# Altium PCB MY_PCB.PcbDoc
Units mil, origin at the board's own origin, x right, y up, seen from the top; angles counter-clockwise.
Board outline 4240.46 x 3860.94 mil, 2 copper layers (Top Layer, Bottom Layer); 241 components, 149 nets, 701 pads, 2 vias.
Unrouted connection lines stored in the file: 369.
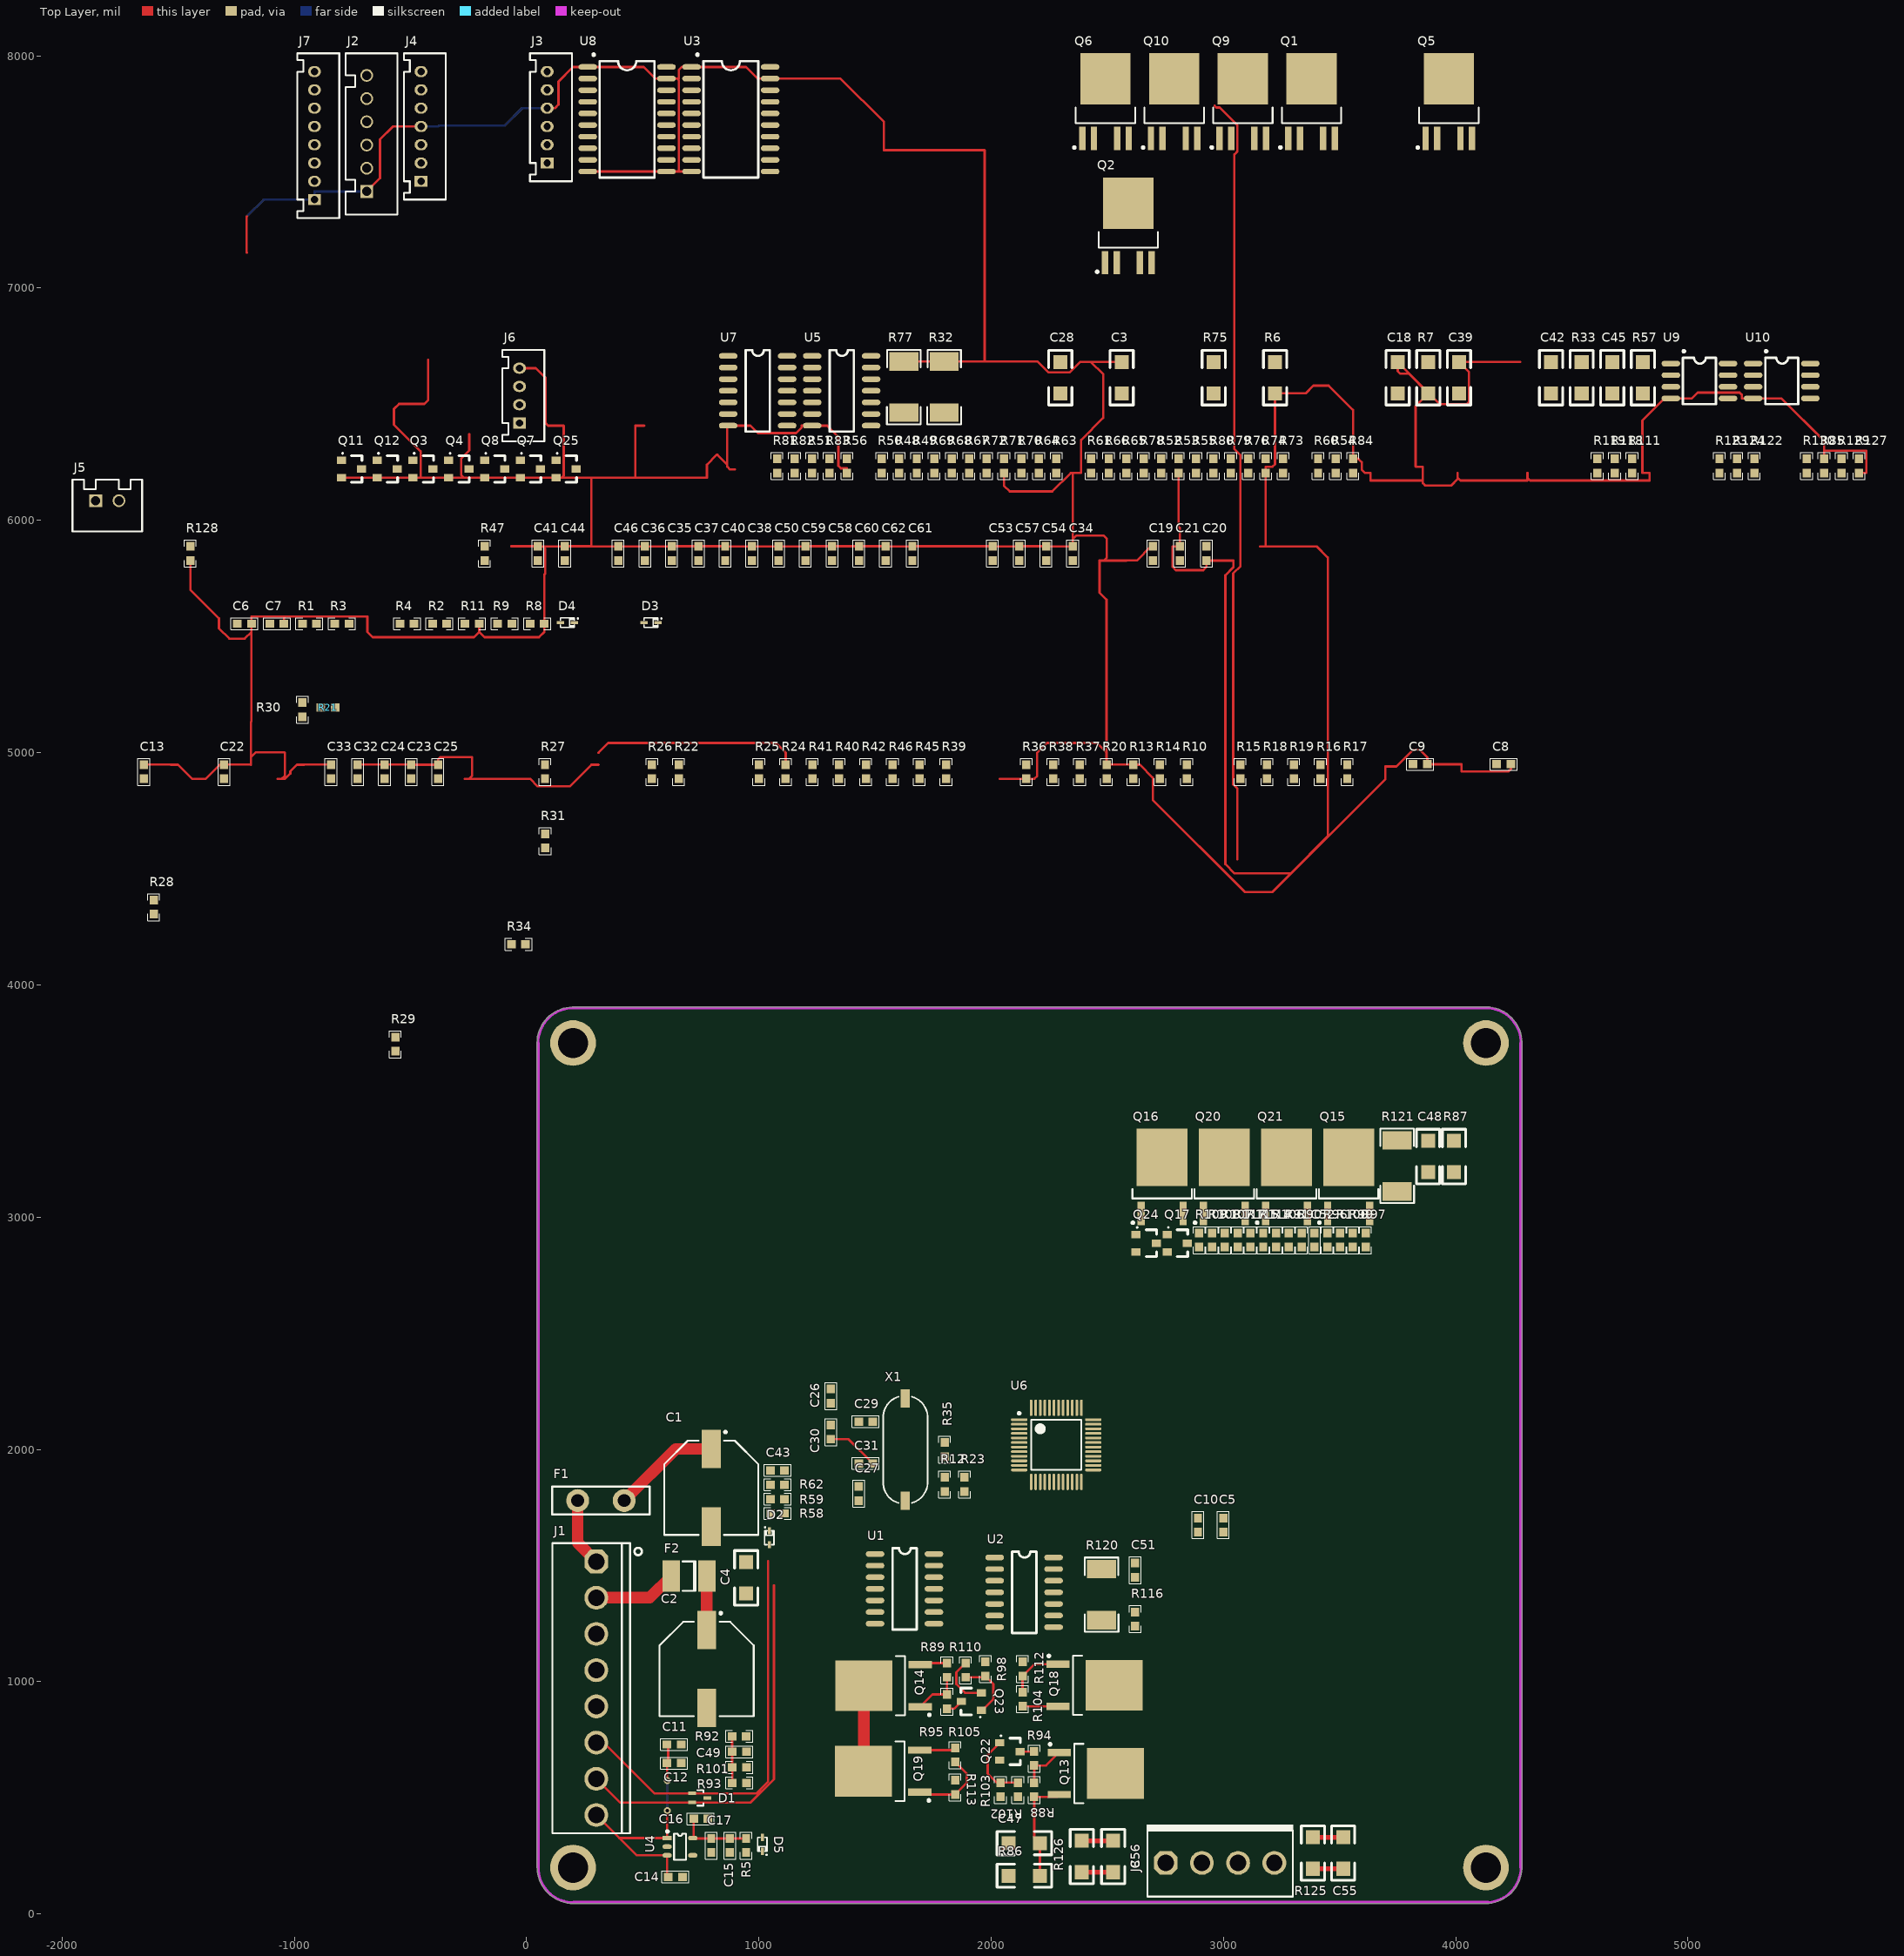
[diagram p0: Top Layer view]
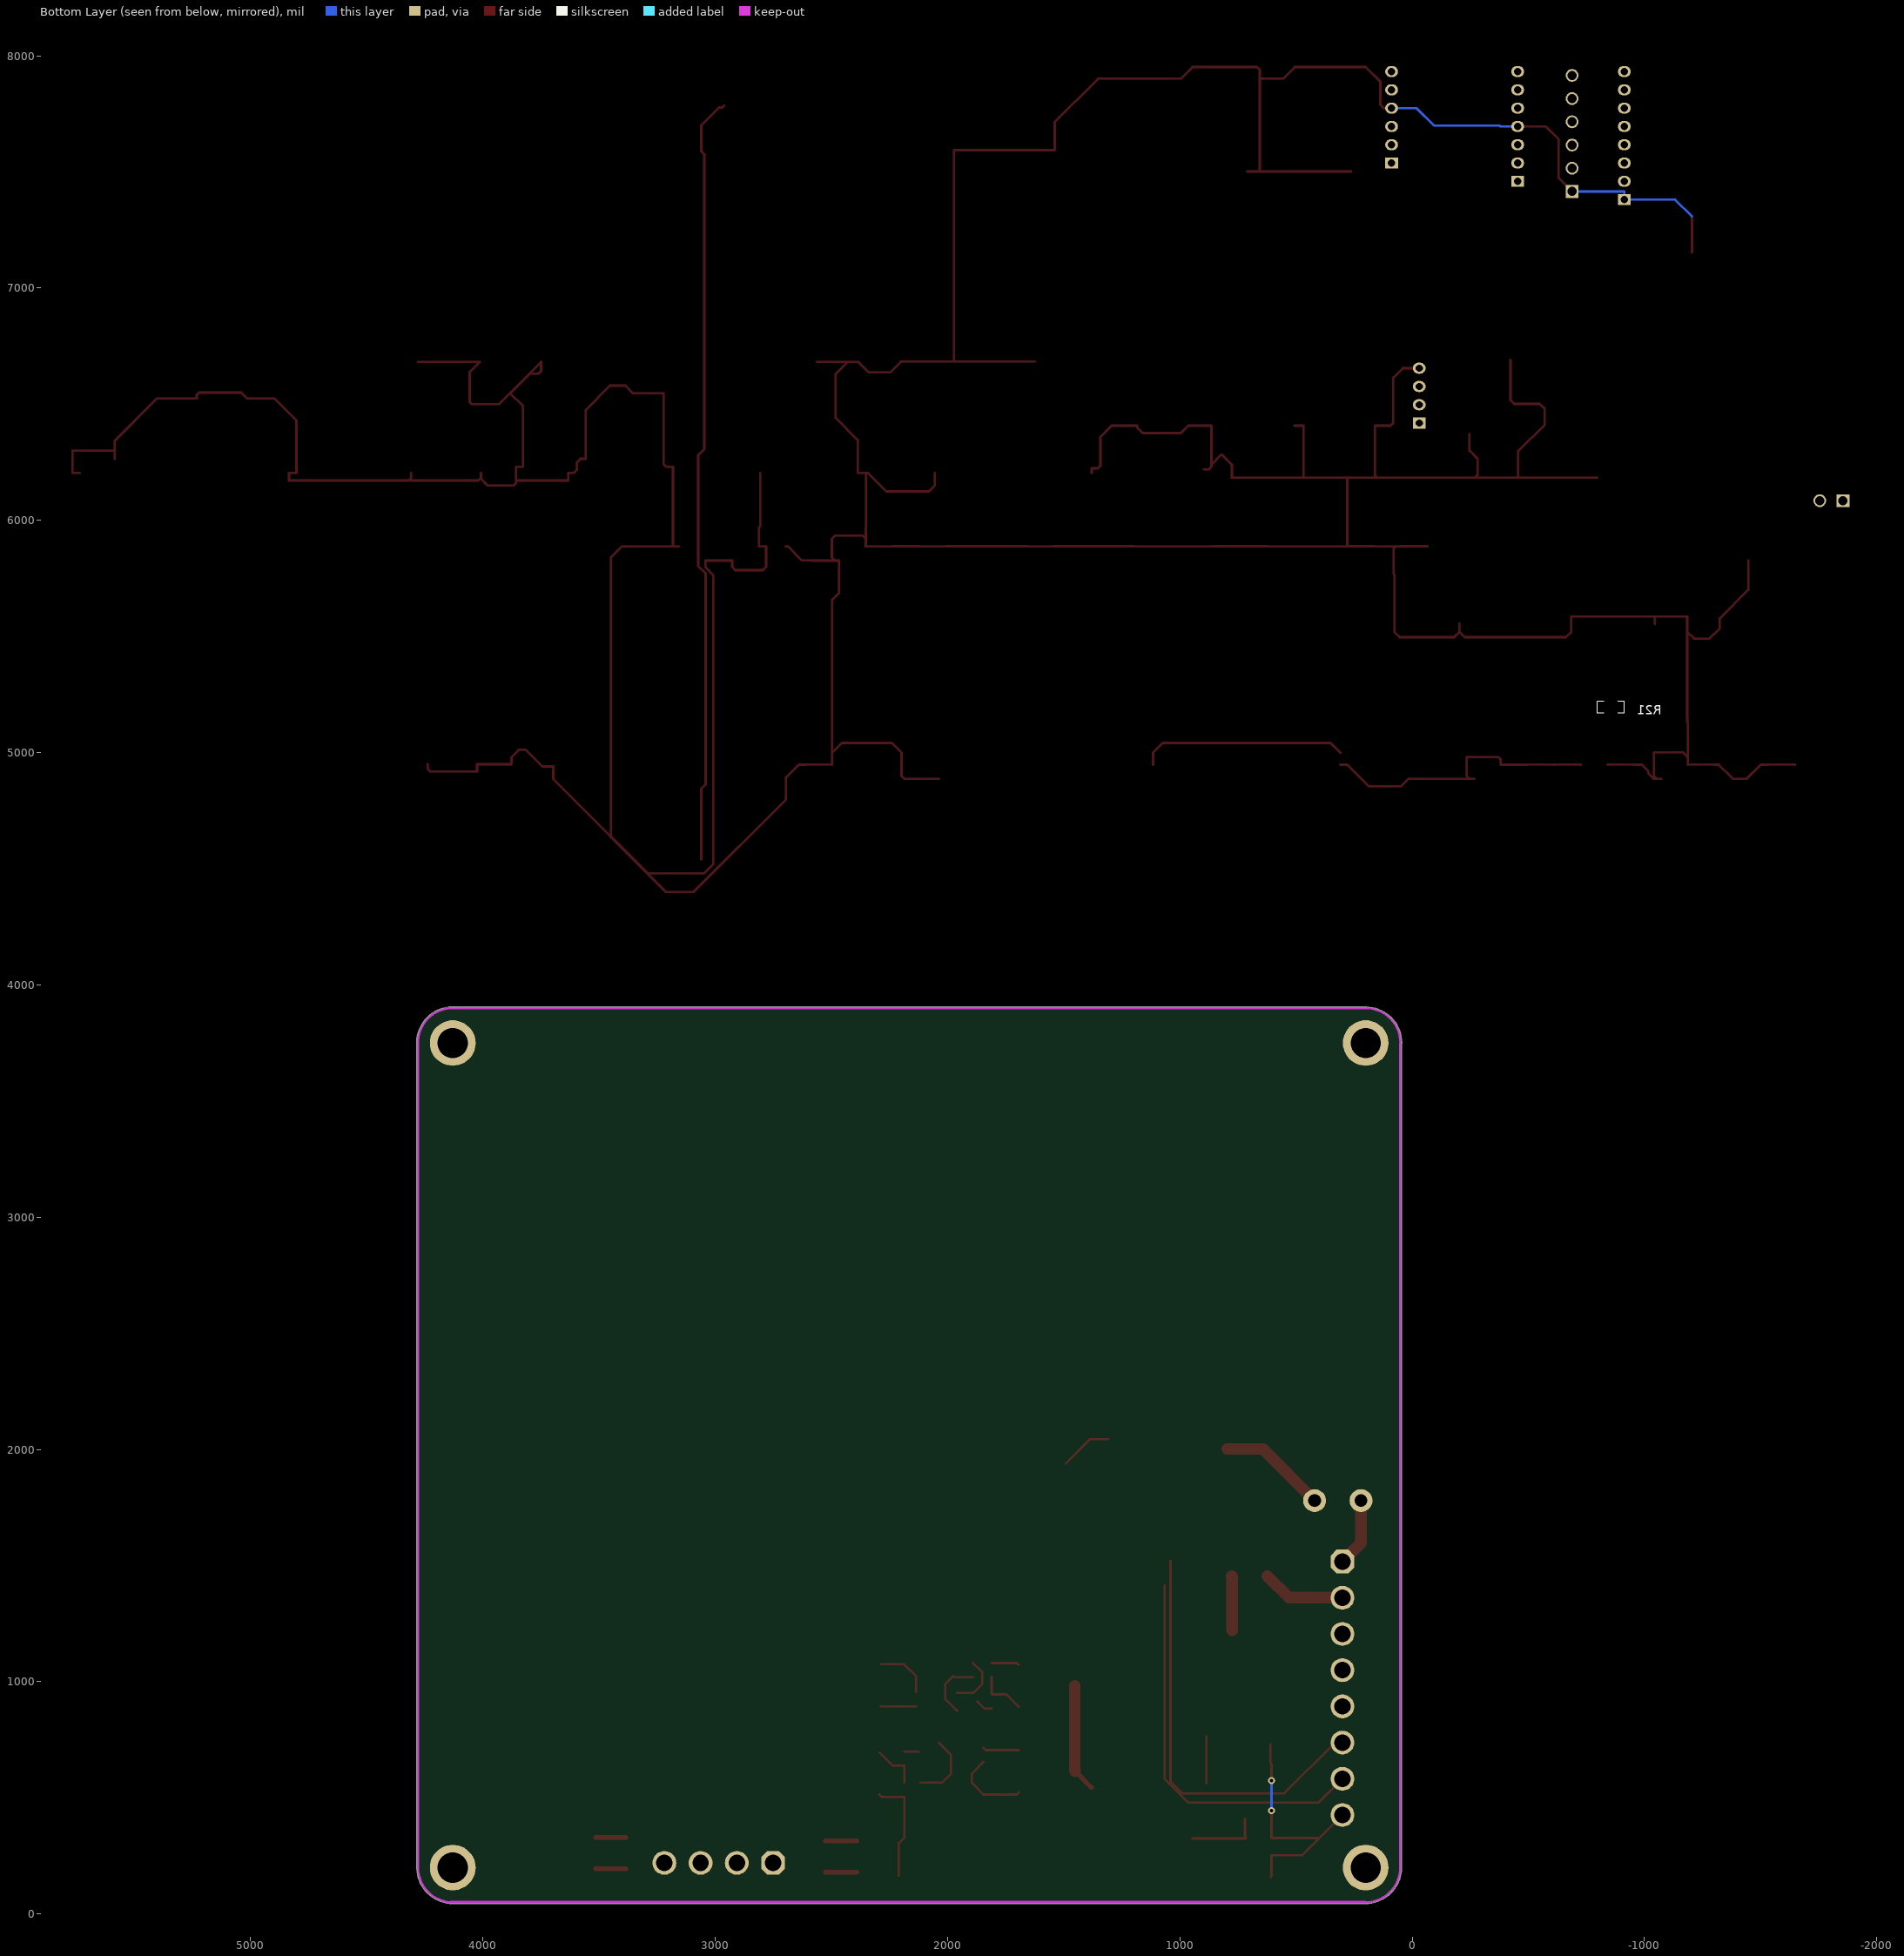
[diagram p1: Bottom Layer view, seen from below]

## Layer stack, top to bottom
Top Layer: signal copper 1.4
Dielectric: dielectric 12.6, FR-4, Dk 4.8
Bottom Layer: signal copper 1.4

## Board outline
46.01,197.12 cw(c51.18,200) 45.26,200 45.26,3748.36 cw(c50,3750) 44.98,3750 cw(c200,3750) 196.8,3904.98 cw(c200,3900) 200,3905.92 4130,3905.92 cw(c4130,3900) 4132.87,3905.18 cw(c4130.37,3750.65) 4284.9,3752.49 cw(c4279.53,3750) 4285.45,3750 4285.45,200 cw(c4279.53,200) 4284.51,196.8 cw(c4130,200) 4142.85,45.99 cw(c4140,51.18) 4140,45.26 202.64,45.26 cw(c201,50) 201,44.99 cw(c201,200)

## Design rules (kind name [scope] priority, off if disabled: settings)
Clearance [All] p1: gap=0.12
ComponentClearance [All] p1: gap=0 collisioncheckmode=3 verticalgap=0 showdistances=TRUE
PolygonConnect [All] p1: connectstyle=Relief reliefconductorwidth=10 reliefentries=4 polygonreliefangle="90 Angle"
RoutingVias [All] p1: holewidth=15 width=30 viastyle="Through Hole" minholewidth=10 minwidth=20 maxholewidth=28 maxwidth=50
SilkscreenOverComponentPads [All] p1: minsilkscreentomaskgap=10
SolderMaskExpansion [All] p1: expansion=4
Width [All] p1: maxlimit=128.11 minlimit=10 preferedwidth=10
26 further rules are at their usual default settings.

## Components (designator, comment, footprint, x,y, rotation, side; value= is the part's Value field where it differs from the comment)
C1 "470uF/35V" CAP_SO_10*10 800,1990 r0 top
C2 "470uF/35V" CAP_SO_10*10 780,1210 r0 top
C3 "C1206" 1206 2561.83,6547.05 r90 top
C4 "C1206" 1206 945,1380 r90 top
C5 "C0603" C0603_M1608 2999.12,1674.53 r90 top
C6 "C0603" C0603_M1608 -1214.88,5555.2 r0 top
C7 "C0603" C0603_M1608 -1074.8,5555.2 r0 top
C8 "C0603" C0603_M1608 4206.91,4950.28 r0 top
C9 "C0603" C0603_M1608 3846.75,4950.28 r0 top
C10 "C0603" C0603_M1608 2890,1674.49 r90 top
C11 "C0603" C0603_M1608 635,730 r180 top
C12 "C0603" C0603_M1608 635,650 r180 top
C13 "C0603" C0603_M1608 -1647.59,4917.8 r90 top
C14 "C0603" C0603_M1608 640,160 r180 top
C15 "C0603" C0603_M1608 875,295 r270 top
C16 "C0603" C0603_M1608 750,410 r180 top
C17 "C0603" C0603_M1608 795,295 r90 top
C18 "C1206" 1206 3749.83,6547.05 r90 top
C19 "C0603" C0603_M1608 2696.81,5857.8 r90 top
C20 "C0603" C0603_M1608 2927.05,5857.8 r90 top
C21 "C0603" C0603_M1608 2811.93,5857.8 r90 top
C22 "C0603" C0603_M1608 -1302.24,4917.8 r90 top
C23 "C0603" C0603_M1608 -496.41,4917.8 r90 top
C24 "C0603" C0603_M1608 -611.53,4917.8 r90 top
C25 "C0603" C0603_M1608 -381.29,4917.8 r90 top
C26 "C0603" C0603_M1608 1310,2230 r270 top
C27 "C0603" C0603_M1608 1430,1810 r270 top
C28 "1206" 1206 2297.83,6547.05 r90 top
C29 "C0603" C0603_M1608 1460,2120 r0 top
C30 "C0603" C0603_M1608 1310,2075 r90 top
C31 "C0603" C0603_M1608 1460,1940 r180 top
C32 "C0603" C0603_M1608 -726.65,4917.8 r90 top
C33 "C0603" C0603_M1608 -841.77,4917.8 r90 top
C34 "C0603" C0603_M1608 2351.46,5857.8 r90 top
C35 "C0603" C0603_M1608 624.69,5857.8 r90 top
C36 "C0603" C0603_M1608 509.57,5857.8 r90 top
C37 "C0603" C0603_M1608 739.8,5857.8 r90 top
C38 "C0603" C0603_M1608 970.04,5857.8 r90 top
C39 "C1206" 1206 4013.83,6547.05 r90 top
C40 "C0603" C0603_M1608 854.92,5857.8 r90 top
C41 "C0603" C0603_M1608 49.1,5857.8 r90 top
C42 "1206" 1206 4409.83,6547.05 r90 top
C43 "C0603" C0603_M1608 1080,1910 r180 top
C44 "C0603" C0603_M1608 164.21,5857.8 r90 top
C45 "1206" 1206 4673.83,6547.05 r90 top
C46 "C0603" C0603_M1608 394.45,5857.8 r90 top
C47 "C1206" 1206 2210,305 r180 top
C48 "C1206" 1206 3880.54,3194 r90 top
C49 "C0603" C0603_M1608 915.51,698.33 r0 top
C50 "C0603" C0603_M1608 1085.16,5857.8 r90 top
C51 "C0603" C0603_M1608 2620,1480 r90 top
C52 "C0603" C0603_M1608 3391.59,2901.61 r90 top
C53 "C0603" C0603_M1608 2006.11,5857.8 r90 top
C54 "C0603" C0603_M1608 2236.34,5857.8 r90 top
C55 "1206" 1206 3515,330 r270 top
C56 "1206" 1206 2525,315 r270 top
C57 "C0603" C0603_M1608 2121.22,5857.8 r90 top
C58 "C0603" C0603_M1608 1315.4,5857.8 r90 top
C59 "C0603" C0603_M1608 1200.28,5857.8 r90 top
C60 "C0603" C0603_M1608 1430.51,5857.8 r90 top
C61 "C0603" C0603_M1608 1660.75,5857.8 r90 top
C62 "C0603" C0603_M1608 1545.63,5857.8 r90 top
D1 "RClamp0502B" SOT-523 745,500 r0 top
D2 "SOD-523" SOD-523 1045,1620 r90 top
D3 "SOD-523" SOD-523 534.86,5559.76 r0 top
D4 "SOD-523" SOD-523 175.61,5559.76 r0 top
D5 "SOD-523" SOD-523 1015,300 r270 top
F1 "BK30-400" FUSE-FRG-5MM 320,1780 r180 top
F2 "1812" 1812 700,1455 r180 top
J1 "VH3.96-8P" VH3.96-8P 300,1050 r270 top
J2 "XH2.54-6" XH2.54-6 -688.36,7666.06 r90 top
J3 "PH2.0-6P" PH2.0-6P 88.43,7735.47 r90 top
J4 "PH2.0-7P" PH2.0-7P -454.49,7696.1 r90 top
J5 "XH2.54-2" XH2.54-2 -1805,6085 r0 top
J6 "PH2.0-4P" PH2.0-4P -30.53,6537.26 r90 top
J7 "PH2.0-8P" PH2.0-8P -913.34,7656.73 r90 top
J8 "VH3.96-4P" VH3.96-4P 2985,220 r0 top
Q1 "TO-252-4" TO-252-4L 3278.93,7644.86 r90 top
Q2 "TO-252-4" TO-252-4L 2490,7110 r90 top
Q3 "SOT-23" SOT-23_L -445.82,6221.19 r0 top
Q4 "SOT-23" SOT-23_L -291.84,6221.19 r0 top
Q5 "TO-252-4" TO-252-4L 3870.11,7644.86 r90 top
Q6 "TO-252-4" TO-252-4L 2392.15,7644.86 r90 top
Q7 "SOT-23" SOT-23_L 16.13,6221.19 r0 top
Q8 "SOT-23" SOT-23_L -137.85,6221.19 r0 top
Q9 "TO-252-4" TO-252-4L 2983.33,7644.86 r90 top
Q10 "TO-252-4" TO-252-4L 2687.74,7644.86 r90 top
Q11 "SOT-23" SOT-23_L -753.79,6221.19 r0 top
Q12 "SOT-23" SOT-23_L -599.8,6221.19 r0 top
Q13 "D-PAK" TO-252-2L 2450.35,605 r0 top
Q14 "D-PAK" TO-252-2L 1536.68,983.11 r180 top
Q15 "D-PAK" TO-252-2L 3538.98,3173.32 r90 top
Q16 "D-PAK" TO-252-2L 2735.83,3173.32 r90 top
Q17 "SOT-23" SOT-23_L 2800.98,2888.14 r0 top
Q18 "D-PAK" TO-252-2L 2445,985 r0 top
Q19 "D-PAK" TO-252-2L 1535,615 r180 top
Q20 "D-PAK" TO-252-2L 3003.54,3173.32 r90 top
Q21 "D-PAK" TO-252-2L 3271.26,3173.32 r90 top
Q22 "SOT-23" SOT-23_L 2080.35,700 r0 top
Q23 "SOT-23" SOT-23_L 1915,915 r180 top
Q24 "SOT-23" SOT-23_L 2666.99,2888.14 r0 top
Q25 "SOT-23" SOT-23_L 170.12,6221.19 r0 top
R1 "R0603" 0603#1 -934.72,5555.2 r0 top
R2 "R0603" 0603#1 -374.41,5555.2 r0 top
R3 "R0603" 0603#1 -794.65,5555.2 r0 top
R4 "R0603" 0603#1 -514.49,5555.2 r0 top
R5 "R0603" 0603#1 945,295 r90 top
R6 "R1206" 1206 3221.83,6547.05 r90 top
R7 "R1206" 1206 3881.83,6547.05 r90 top
R8 "R0603" 0603#1 45.83,5555.2 r0 top
R9 "R0603" 0603#1 -94.25,5555.2 r0 top
R10 "R0603" 0603#1 2842.02,4917.8 r90 top
R11 "R0603" 0603#1 -234.33,5555.2 r0 top
R12 "R0603" 0603#1 1800,1850 r270 top
R13 "R0603" 0603#1 2611.78,4917.8 r90 top
R14 "R0603" 0603#1 2726.9,4917.8 r90 top
R15 "R0603" 0603#1 3072.25,4917.8 r90 top
R16 "R0603" 0603#1 3417.61,4917.8 r90 top
R17 "R0603" 0603#1 3532.72,4917.8 r90 top
R18 "R0603" 0603#1 3187.37,4917.8 r90 top
R19 "R0603" 0603#1 3302.49,4917.8 r90 top
R20 "R0603" 0603#1 2496.66,4917.8 r90 top
R21 "R0603" 0603#2 -855,5195 r180 bottom
R22 "R0603" 0603#1 654.77,4917.8 r90 top
R23 "R0603" 0603#1 1885,1850 r270 top
R24 "R0603" 0603#1 1115.24,4917.8 r90 top
R25 "R0603" 0603#1 1000.12,4917.8 r90 top
R26 "R0603" 0603#1 539.65,4917.8 r90 top
R27 "R0603" 0603#1 79.18,4917.8 r90 top
R28 "R0603" 0603#1 -1605,4335 r90 top
R29 "R0603" 0603#1 -565,3745 r90 top
R30 "R0603" 0603#1 -965,5185 r90 top
R31 "R0603" 0603#1 80,4620 r90 top
R32 "R2512" R2512 1797.66,6464.05 r90 top
R33 "R1206" 1206 4541.83,6547.05 r90 top
R34 "R0603" 0603#1 -35,4175 r0 top
R35 "R0603" 0603#1 1800,2000 r270 top
R36 "R0603" 0603#1 2151.31,4917.8 r90 top
R37 "R0603" 0603#1 2381.54,4917.8 r90 top
R38 "R0603" 0603#1 2266.42,4917.8 r90 top
R39 "R0603" 0603#1 1805.95,4917.8 r90 top
R40 "R0603" 0603#1 1345.48,4917.8 r90 top
R41 "R0603" 0603#1 1230.36,4917.8 r90 top
R42 "R0603" 0603#1 1460.6,4917.8 r90 top
R45 "R0603" 0603#1 1690.83,4917.8 r90 top
R46 "R0603" 0603#1 1575.71,4917.8 r90 top
R47 "R0603" 0603#1 -181.14,5857.8 r90 top
R48 "R0603" 0603#1 1604.43,6234.65 r90 top
R49 "R0603" 0603#1 1679.55,6234.65 r90 top
R50 "R0603" 0603#1 1529.31,6234.65 r90 top
R51 "R0603" 0603#1 1228.84,6234.65 r90 top
R52 "R0603" 0603#1 2731.21,6234.65 r90 top
R53 "R0603" 0603#1 2806.32,6234.65 r90 top
R54 "R0603" 0603#1 3482.39,6234.65 r90 top
R55 "R0603" 0603#1 2881.44,6234.65 r90 top
R56 "R0603" 0603#1 1379.08,6234.65 r90 top
R57 "R1206" 1206 4805.83,6547.05 r90 top
R58 "R0603" 0603#1 1080,1725 r180 top
R59 "R0603" 0603#1 1079.96,1786.67 r0 top
R60 "R0603" 0603#1 3407.27,6234.65 r90 top
R61 "R0603" 0603#1 2430.73,6234.65 r90 top
R62 "R0603" 0603#1 1080,1848.33 r0 top
R63 "R0603" 0603#1 2280.5,6234.65 r90 top
R64 "R0603" 0603#1 2205.38,6234.65 r90 top
R65 "R0603" 0603#1 2580.97,6234.65 r90 top
R66 "R0603" 0603#1 2505.85,6234.65 r90 top
R67 "R0603" 0603#1 1904.91,6234.65 r90 top
R68 "R0603" 0603#1 1829.79,6234.65 r90 top
R69 "R0603" 0603#1 1754.67,6234.65 r90 top
R70 "R0603" 0603#1 2130.26,6234.65 r90 top
R71 "R0603" 0603#1 2055.14,6234.65 r90 top
R72 "R0603" 0603#1 1980.02,6234.65 r90 top
R73 "R0603" 0603#1 3257.03,6234.65 r90 top
R74 "R0603" 0603#1 3181.92,6234.65 r90 top
R75 "R1206" 1206 2957.83,6547.05 r90 top
R76 "R0603" 0603#1 3106.8,6234.65 r90 top
R77 "R2512" R2512 1623.99,6464.05 r90 top
R78 "R0603" 0603#1 2656.09,6234.65 r90 top
R79 "R0603" 0603#1 3031.68,6234.65 r90 top
R80 "R0603" 0603#1 2956.56,6234.65 r90 top
R81 "R0603" 0603#1 1078.61,6234.65 r90 top
R82 "R0603" 0603#1 1153.72,6234.65 r90 top
R83 "R0603" 0603#1 1303.96,6234.65 r90 top
R84 "R0603" 0603#1 3557.51,6234.65 r90 top
R85 "R0603" 0603#1 5585.7,6234.65 r90 top
R86 "R1206" 1206 2075,165 r0 top
R87 "R1206" 1206 3992.54,3194 r90 top
R88 "R0603" 0603#1 2185.35,535 r270 top
R89 "R0603" 0603#1 1810,1050 r90 top
R90 "R0603" 0603#1 3336.48,2901.61 r90 top
R91 "R0603" 0603#1 3281.36,2901.61 r90 top
R92 "R0603" 0603#1 915,765 r0 top
R93 "R0603" 0603#1 916.02,565 r180 top
R94 "R0603" 0603#1 2185.35,670 r270 top
R95 "R0603" 0603#1 1810,915 r90 top
R96 "R0603" 0603#1 3446.71,2901.61 r90 top
R97 "R0603" 0603#1 3612.07,2901.61 r90 top
R98 "R0603" 0603#1 1975,1055 r270 top
R99 "R0603" 0603#1 3556.95,2901.61 r90 top
R100 "R0603" 0603#1 3501.83,2901.61 r90 top
R101 "R0603" 0603#1 915.51,631.67 r180 top
R102 "R0603" 0603#1 2115.35,535 r270 top
R103 "R0603" 0603#1 2040.35,535 r90 top
R104 "R0603" 0603#1 2135,925 r270 top
R105 "R0603" 0603#1 1845,685 r90 top
R106 "R0603" 0603#1 3226.24,2901.61 r90 top
R107 "R0603" 0603#1 3005.77,2901.61 r90 top
R108 "R0603" 0603#1 2950.65,2901.61 r90 top
R109 "R0603" 0603#1 2895.53,2901.61 r90 top
R110 "R0603" 0603#1 1890,1050 r270 top
R111 "R0603" 0603#1 4759.4,6234.65 r90 top
R112 "R0603" 0603#1 2135,1055 r270 top
R113 "R0603" 0603#1 1845,545 r270 top
R114 "R0603" 0603#1 3171.12,2901.61 r90 top
R115 "R0603" 0603#1 3116,2901.61 r90 top
R116 "R0603" 0603#1 2620,1270 r90 top
R117 "R0603" 0603#1 3060.88,2901.61 r90 top
R118 "R0603" 0603#1 4684.28,6234.65 r90 top
R119 "R0603" 0603#1 4609.16,6234.65 r90 top
R120 "R2512" R2512 2475,1265 r90 top
R121 "R2512" R2512 3747.7,3111 r90 top
R122 "R0603" 0603#1 5285.22,6234.65 r90 top
R123 "R0603" 0603#1 5134.99,6234.65 r90 top
R124 "R0603" 0603#1 5210.11,6234.65 r90 top
R125 "R1206" 1206 3385,330 r270 top
R126 "R1206" 1206 2390,315 r270 top
R127 "R0603" 0603#1 5735.93,6234.65 r90 top
R128 "R0603" 0603#1 -1447.44,5857.8 r90 top
R129 "R0603" 0603#1 5660.82,6234.65 r90 top
R130 "R0603" 0603#1 5510.58,6234.65 r90 top
U1 "SO-14" SO-14 1500,1550 r0 top
U2 "SO-14" SO-14 2015,1535 r0 top
U3 "SOP-20" SOP-20 879.34,7727.16 r0 top
U4 "XC6503D331" SOT23-5 660,290 r0 top
U5 "SO-14" SO-14 1229.5,6708.05 r0 top
U6 "LQFP48_N" LQFP48_N 2280,2020 r0 top
U7 "SO-14" SO-14 867.84,6708.05 r0 top
U8 "SOP-20" SOP-20 432.76,7727.16 r0 top
U9 "SO-8" SO-8 4925.83,6675.2 r0 top
U10 "SO-8" SO-8 5280.02,6675.2 r0 top
X1 "8M" HC-49SMD 1630,2000 r90 top

## Footprints (in the part's own frame and the unit in brackets; to place one, negate y for a bottom-side part, rotate by r counter-clockwise, add the part's x,y. Pads: shape width x height; smd on the part's side, far side on the other; paste and mask are expansions set on the pad)
0603#1 [mm]
  rect 0.95x0.9 smd: 1(-0.775,0) 2(0.775,0)
  Top Overlay keep-out lines w0.1: -0.75,-0.65 -1.475,-0.65 -1.475,0.65 -0.75,0.65 ; 0.75,-0.65 1.475,-0.65 1.475,0.65 0.75,0.65
  silkscreen extent -1.48,-0.65 1.47,0.65
0603#2 [mm]
  rect 0.95x0.9 smd far side: 1(-0.775,0) 2(0.775,0)
  Top Overlay keep-out lines w0.1: 0.75,-0.65 1.475,-0.65 1.475,0.65 0.75,0.65 ; -0.75,-0.65 -1.475,-0.65 -1.475,0.65 -0.75,0.65
  silkscreen extent -1.47,-0.65 1.47,0.65
1206 [mil]
  rect 60x60 smd: 1(0,0) 2(135,0)
  Top Overlay keep-out lines w12: 25,50 -50,50 -50,-50 25,-50 ; 110,50 185,50 185,-50 110,-50
  silkscreen extent -50,-50 185,50
1812 [mm] "Chip Capacitor; Body 4.5 x 3.2 mm (L"
  rect 1.9x3.4 smd: 1(-1.95,0) 2(1.95,0)
  Top Overlay keep-out lines w0.2: 0.7,1.6 -0.7,1.6 -0.7,-1.6 0.7,-1.6 ; -0.51,1.6 -0.51,-1.6
  silkscreen extent -0.7,-1.6 0.7,1.6
C0603_M1608 [mm] "Chip Capacitor, 2-Leads, Body 1.6x0.8mm, IPC Medium D"
  rect 0.95x0.9 smd: 1(-0.775,0) 2(0.775,0)
  Top Overlay keep-out lines w0.1: -1.475,0.65 1.475,0.65 1.475,-0.65 -1.475,-0.65 -1.475,0.65
  silkscreen extent -1.48,-0.65 1.47,0.65
CAP_SO_10*10 [mm]
  rect 2.05x4.2 smd: 1(-0.127,0.313) 2(-0.127,-8.187)
  Top Overlay keep-out lines w0.2: -1.527,-9.087 -5.277,-9.087 -5.277,-1.362 -2.702,1.213 -1.527,1.213 ; 1.273,-9.087 5.023,-9.087 5.023,-1.362 2.448,1.213 1.273,1.213
  silkscreen extent -5.28,-9.09 5.02,2.29
FUSE-FRG-5MM [mm]
  round 2.5 hole 1.4: 1(-2.54,0) 2(2.54,0)
  Top Overlay keep-out lines w0.254: 5.334,1.524 5.334,-1.524 -5.334,-1.524 -5.334,0 -5.334,1.524 5.334,1.524
  silkscreen extent -5.33,-1.52 5.33,1.52
HC-49SMD [mm]
  rect 2x1 smd: 1(-5.588,0) 2(5.588,0)
  Top Overlay keep-out lines w0.178: -3.622,2.413 3.521,2.413 ; -3.5,-2.464 3.4,-2.464
  silkscreen extent -5.85,-2.46 5.78,2.41
LQFP48_N [mm]
  oval 1.8x0.3 smd: 1(-4.05,2.75) 2(-4.05,2.25) 3(-4.05,1.75) 4(-4.05,1.25) 5(-4.05,0.75) 6(-4.05,0.25) 7(-4.05,-0.25) 8(-4.05,-0.75) 9(-4.05,-1.25) 10(-4.05,-1.75) 11(-4.05,-2.25) 12(-4.05,-2.75) 25(4.05,-2.75) 26(4.05,-2.25) 27(4.05,-1.75) 28(4.05,-1.25) 29(4.05,-0.75) 30(4.05,-0.25) 31(4.05,0.25) 32(4.05,0.75) 33(4.05,1.25) 34(4.05,1.75) 35(4.05,2.25) 36(4.05,2.75)
  oval 0.3x1.8 smd: 13(-2.75,-4.05) 14(-2.25,-4.05) 15(-1.75,-4.05) 16(-1.25,-4.05) 17(-0.75,-4.05) 18(-0.25,-4.05) 19(0.25,-4.05) 20(0.75,-4.05) 21(1.25,-4.05) 22(1.75,-4.05) 23(2.25,-4.05) 24(2.75,-4.05) 37(2.75,4.05) 38(2.25,4.05) 39(1.75,4.05) 40(1.25,4.05) 41(0.75,4.05) 42(0.25,4.05) 43(-0.25,4.05) 44(-0.75,4.05) 45(-1.25,4.05) 46(-1.75,4.05) 47(-2.25,4.05) 48(-2.75,4.05)
  Top Overlay keep-out lines w0.2: -2.75,-2.75 -2.75,2.75 2.75,2.75 2.75,-2.75 -2.75,-2.75
  Mechanical 13 keep-out lines w0.1: -3.5,-3.5 -3.5,3.5 3.5,3.5 3.5,-3.5 -3.5,-3.5
  Mechanical 15 keep-out lines w0.1: -0.5,0 0.5,0 ; 0,-0.5 0,0.5 ; -5.2,-5.2 -5.2,5.2 5.2,5.2 5.2,-5.2 -5.2,-5.2
  silkscreen extent -4.17,-2.75 2.75,3.57
PH2.0-4P [mm]
  rect 1.2x1.4 hole 0.8: 1(-3,0)
  oval 1.2x1.4 hole 0.8: 2(-1,0) 3(1,0) 4(3,0)
  Top Overlay keep-out lines w0.2: -5,1.88 -5,-2.72 ; -4.981,1.88 -4.27,1.88 -4.27,1.219 -3,1.219 -3,1.88 ; -2.975,1.88 2.981,1.88 2.981,1.219 4.251,1.219 4.251,1.88 4.988,1.88 ; 5,1.88 5,-2.72 ; -5.007,-2.718 5,-2.718
  silkscreen extent -5.01,-2.72 5,1.88
PH2.0-6P [mm]
  rect 1.2x1.4 hole 0.8: 1(-5,0)
  oval 1.2x1.4 hole 0.8: 2(-3,0) 3(-1,0) 4(1,0) 5(3,0) 6(5,0)
  Top Overlay keep-out lines w0.2: -7,1.88 -7,-2.72 ; -6.981,1.88 -6.27,1.88 -6.27,1.219 -5,1.219 -5,1.88 ; -4.975,1.88 4.981,1.88 4.981,1.219 6.251,1.219 6.251,1.88 6.988,1.88 ; 7,1.88 7,-2.72 ; -7.007,-2.718 7,-2.718
  silkscreen extent -7.01,-2.72 7,1.88
PH2.0-7P [mm]
  rect 1.2x1.4 hole 0.8: 1(-6,0)
  oval 1.2x1.4 hole 0.8: 2(-4,0) 3(-2,0) 4(0,0) 5(2,0) 6(4,0) 7(6,0)
  Top Overlay keep-out lines w0.2: -8,1.88 -8,-2.72 ; -7.981,1.88 -7.27,1.88 -7.27,1.219 -6,1.219 -6,1.88 ; -5.975,1.88 5.981,1.88 5.981,1.219 7.251,1.219 7.251,1.88 7.988,1.88 ; 8,1.88 8,-2.72 ; -8.007,-2.718 8,-2.718
  silkscreen extent -8.01,-2.72 8,1.88
PH2.0-8P [mm]
  rect 1.2x1.4 hole 0.8: 1(-7,0)
  oval 1.2x1.4 hole 0.8: 2(-5,0) 3(-3,0) 4(-1,0) 5(1,0) 6(3,0) 7(5,0) 8(7,0)
  Top Overlay keep-out lines w0.2: -9,1.88 -9,-2.72 ; -8.981,1.88 -8.27,1.88 -8.27,1.219 -7,1.219 -7,1.88 ; -6.975,1.88 6.981,1.88 6.981,1.219 8.251,1.219 8.251,1.88 8.988,1.88 ; 9,1.88 9,-2.72 ; -9.007,-2.718 9,-2.718
  silkscreen extent -9.01,-2.72 9,1.88
R2512 [mil]
  rect 80x125 smd: 1(0,0) 2(220,0)
  Top Overlay keep-out lines w8: 25,72.83 -50,72.83 -50,-72.83 25,-72.83 ; 195,71.85 270,71.85 270,-71.85 195,-71.85
  silkscreen extent -50,-73 270,73
SO-8 [mil]
  oval 80x24 smd: 1(0,0) 2(0,-50) 3(0,-100) 4(0,-150) 5(246.18,-150) 6(246.18,-100) 7(246.18,-50) 8(246.18,0)
  Top Overlay keep-out lines w10: 99.96,25 52,25 52,-175 194,-175 194,25 149.96,25
  silkscreen extent 51,-175 194,58
SO-14 [mil]
  oval 80x24 smd: 1(0,0) 2(0,-50) 3(0,-100) 4(0,-150) 5(0,-200) 6(0,-250) 7(0,-300) 8(253.66,-300) 9(253.66,-250) 10(253.66,-200) 11(253.66,-150) 12(253.66,-100) 13(253.66,-50) 14(253.66,0)
  Top Overlay keep-out lines w10: 103.35,25 74.96,25 74.96,-325 179.53,-325 179.53,25 153.35,25
  silkscreen extent 75,-325 180,25
SOD-523 [mm]
  rect 0.8x0.35 smd: 1(-0.762,0) 2(0.762,0)
  Top Overlay keep-out lines w0.15: 0.254,0.508 0.254,-0.508 ; -0.762,0.254 -0.762,0.508 0.762,0.508 0.762,0.254 ; -0.762,-0.254 -0.762,-0.508 0.762,-0.508 0.762,-0.254
  silkscreen extent -0.76,-0.51 1.19,0.51
SOP-20 [mil]
  oval 80x24 smd: 1(-169.29,225) 2(-169.29,175) 3(-169.29,125) 4(-169.29,75) 5(-169.29,25) 6(-169.29,-25) 7(-169.29,-75) 8(-169.29,-125) 9(-169.29,-175) 10(-169.29,-225) 11(169.29,-225) 12(169.29,-175) 13(169.29,-125) 14(169.29,-75) 15(169.29,-25) 16(169.29,25) 17(169.29,75) 18(169.29,125) 19(169.29,175) 20(169.29,225)
  Top Overlay keep-out lines w10: -39,250 -118.11,250 -118.11,-251 118.11,-251 118.11,250 39,250
  silkscreen extent -149,-251 118,283
SOT23-5 [mil] "SOT23, 5-Leads, Body 3.1x3.0mm (max), Pitch 0.95mm, IPC Medium D"
  rect 40x20 smd: 1(-55,37.4)
  oval 40x20 smd: 2(-55,0) 3(-55,-37.4) 4(55,-37.4) 5(55,37.4)
  Top Overlay keep-out lines w7.87: -25,55.4 -25,-56.8 25.7,-56.8 25.7,55.4
  Top Overlay keep-out lines w8: -25,55.4 -9,55.4 ; 9.7,55.4 25.7,55.4
  silkscreen extent -59,-57 26,70
SOT-23_L [mm]
  rect 1x0.8 smd: 1(-1.1,0.953) 2(-1.1,-0.952) 3(1.1,-0.013)
  Top Overlay keep-out lines w0.305: 0,-1.46 1.143,-1.46 1.143,-0.952 ; 0,1.46 1.143,1.46 1.143,0.952 ; -0.965,1.714 -0.965,1.715
  silkscreen extent -0.97,-1.46 1.14,1.71
SOT-523 [mm] "SOT23, 3-Leads, Body 1.7x1.8mm (max), Pitch 0.50mm, IPC Medium D"
  rect 0.85x0.4 smd: 1(-0.825,-0.5) 2(-0.825,0.5) 3(0.825,0)
  Top Overlay keep-out lines w0.2: -0.254,-0.85 0.425,-0.85 0.425,-0.6 ; -0.254,0.85 0.425,0.85 0.425,0.6
  silkscreen extent -0.25,-0.85 0.42,0.85
TO-252-2L [mm]
  rect 2.55x0.8 smd: 1(-4,2.3) 2(-4,-2.3)
  rect 6.25x5.55 smd: 3(2.15,0)
  Top Overlay keep-out lines w0.2: -1.35,-3.25 -2.35,-3.25 -2.35,3.25 -1.35,3.25
  Mechanical 15 keep-out lines w0.1: 3.5,-2.668 3.946,-2.668 4.85,-1.666 4.85,1.666 3.946,2.668 3.5,2.668 ; -2.05,-3.25 -2.05,3.25 3.5,3.25 3.5,-3.25 -2.05,-3.25
  silkscreen extent -5.12,-3.25 -1.35,3.32
TO-252-4L [mm]
  rect 2.55x0.7 smd: 1(0,0) 2(0,-1.27) 3(0,-3.81) 4(0,-5.08)
  rect 5.6x5.5 smd: 5(6.5,-2.54)
  Top Overlay keep-out lines w0.2: 3.35,0.71 1.65,0.71 1.65,-5.79 3.35,-5.79
  silkscreen extent -1.12,-5.79 3.35,0.98
VH3.96-4P [mm]
  oct 2.6x2.6 hole 1.8: 1(-5.94,0)
  round 2.6 hole 1.8: 2(-1.98,0) 3(1.98,0) 4(5.94,0)
  Top Overlay keep-out lines w0.2: -7.947,-3.683 7.954,-3.683 7.954,3.556 -7.947,3.556 -7.947,-3.683
  silkscreen extent -8.02,-3.68 8.03,4.19
VH3.96-8P [mm]
  oct 2.6x2.6 hole 1.8: 1(-11.88,0)
  round 2.6 hole 1.8: 2(-7.92,0) 3(-3.96,0) 4(0,0) 5(3.96,0) 6(7.92,0) 7(11.88,0) 8(15.84,0)
  Top Overlay keep-out lines w0.2: 17.84,2.794 -13.887,2.794 ; 17.84,-4.8 17.84,3.7 -13.887,3.7 -13.887,-4.8 17.84,-4.8
  silkscreen extent -13.89,-4.8 17.84,4.97
XH2.54-2 [mm]
  rect 1.4x1.4 hole 1: 1(-1.27,0)
  round 1.4 hole 1: 2(1.27,0)
  Top Overlay keep-out lines w0.2: 2.921,2.286 3.81,2.286 ; 3.81,-3.353 -3.81,-3.353 -3.81,-1.27 -3.81,2.286 -2.54,2.286 -2.54,1.27 -1.27,1.27 -1.27,2.286 1.27,2.286 1.27,1.27 2.54,1.27 2.54,2.286 3.81,2.286 ; 3.81,-3.302 3.81,2.286
  silkscreen extent -3.81,-3.35 3.81,2.29
XH2.54-6 [mm]
  rect 1.4x1.4 hole 1: 1(-6.35,0)
  round 1.4 hole 1: 2(-3.81,0) 3(-1.27,0) 4(1.27,0) 5(3.81,0) 6(6.35,0)
  Top Overlay keep-out lines w0.2: -8.89,2.286 -8.89,-1.27 -8.89,-3.353 8.763,-3.353 8.763,2.286 6.35,2.286 6.35,1.27 5.08,1.27 5.08,2.286 -5.08,2.286 -5.08,1.27 -6.35,1.27 -6.35,2.286 -8.89,2.286
  silkscreen extent -8.89,-3.35 8.76,2.29

## Part data
C1 C2: library part "Cap Pol3", "Polarized Capacitor (Surface Mo"
C3 C4 C18 C28 C39 C42 C45 C47 C48 C55 C56: library part Cap, "Capac"
C5 C6 C7 C8 C9 C10 C11 C12 C13 C14 C15 C16 C17 C19 C20 C21 C22 C23 C24 C25 C26 C27 C29 C30 C31 C32 C33 C34 C35 C36 C37 C38 C40 C41 C43 C44 C46 C49 C50 C51 C52 C53 C54 C57 C58 C59 C60 C61 C62: library part Cap, "Capacitor"
D1: library part LCTVS
D2 D3 D4 D5: library part DIODE, "Default D"
F2: library part PPTC
J1: library part VH3.9
J2: library part PH2.0-6P, "Header, 6"
J3 J7: "Header, 6"
J4: "Header, 7"
J5: library part XH2P, "Header, 2"
J6: library part "Header 4", "Header, 4"
J8: "Header, 3"
Q1 Q2 Q5 Q6 Q9 Q10: library part MOS-DUAL
Q3 Q4 Q7 Q8 Q11 Q12 Q17 Q22 Q23 Q24 Q25: library part NPN, "NPN Bipolar Transi"
Q13 Q14 Q15 Q16: library part MOS-P, "P-Channel MO"
Q18 Q19 Q20 Q21: library part MOS-N, "N-Channel MO"
R1 R2 R3 R4 R5 R6 R7 R8 R9 R10 R11 R12 R13 R14 R15 R16 R17 R18 R19 R20 R21 R22 R23 R24 R25 R26 R27 R28 R29 R30 R31 R32 R33 R34 R35 R36 R37 R38 R39 R40 R41 R42 R45 R46 R47 R48 R49 R50 R51 R52 R53 R54 R55 R56 R57 R58 R59 R60 R61 R62 R63 R64 R65 R66 R67 R68 R69 R70 R71 R72 R73 R74 R75 R76 R77 R78 R79 R80 R81 R82 R83 R84 R85 R86 R87 R88 R89 R90 R91 R92 R93 R94 R95 R96 R97 R98 R99 R100 R101 R102 R103 R104 R105 R106 R107 R108 R109 R110 R111 R112 R113 R114 R115 R116 R117 R118 R119 R120 R121 R122 R123 R124 R125 R126 R127 R128 R129 R130: library part Res1, "Resi"
U1 U5 U7: library part SN74AHCT08N, "Quadruple 2-Input Positive-AND"
U2: library part SN74ACT14N, "Hex Schmitt-Trigger Inve"
U3 U8: library part 74H
U4: library part XC6503Dxxx
U6: library part STM32F103C8T6, "STM32 ARM-based 32-bit MCU with 64 Kbytes Flash, 48-pin LQFP, Industrial Tempera"

## Free pads (board coordinates)
  round 196.85 hole 129.92: 1(200,200) 1(200,200) 1(200,3750) 1(4130,200) 1(4130,200) 1(4130,3750) 1(4130,3750)

## Via types
v1: diameter 30, hole 15, Top Layer to Bottom Layer, 2 vias

## Nets (pads, with @x,y where several pads share a name; then routed paths per layer and width w, separated by ;. In a path a pad name is that pad's centre, name@x,y a point inside that pad or via, vN(x,y) a via of type N, cw(c..) or ccw(c..) an arc to the next point about the centre after c; other vN are vias at no path point)
3.3V: C13.1 C15.1 C16.2 C17.2 C19.1 C30.1 C31.1 C41.1 C46.1 C50.1 C57.1 C58.1 C60.1 D2.2 D5.2 J2.6 J3.1 J4.1 J6.1 R1.2 R2.2 R3.2 R4.2 R5.2 R14.2 R15.2 R16.2 R17.2 R35.2 R37.2 R38.2 R39.2 R40.2 R41.2 R42.2 R64.2 R78.1 R80.1 R111.2 R119.2 R129.1 U3.20 U4.5 U6.1 U6.9 U6.24 U6.48 U8.20 U9.8 U10.8 | length 539
  Top Layer w10: C16.2 719.49,331.89 U4.5 716.89,325.51 C17.2 C15.1 R5.2 ; C30.1 1386.02,2044.49 C31.1
24V: C1.1 C3.1 C47.1 C48.1 F1.1 Q13.2 Q14.2 Q15.2 Q16.2 R86.2 R87.2 R88.2 R89.2 R90.2 R91.2 R92.2 | length 1047.1
  Top Layer w10: Q14.2 1701.01,1080.51 R89.2 ; R86.2 C47.1 2185.35,329.65 R88.2 2282.91,504.49 Q13.2
  Top Layer w50: F1.1 642.32,2002.32 C1.1
ADC-H-IN: C25.1 R27.1 U10.3
ADC-HEAD: C53.1 R118.2 U6.19
ADC-L: C61.1 R79.2 U6.10
ADC-L-IN: C51.1 R116.2 U9.3
ADC-R: C62.1 R81.1 U6.11
ADC-R-IN: C52.1 R117.2 U9.5
ADC-W-IN: C44.1 R76.1 U10.5
ADC-WING: C54.1 R122.1 U6.18
DIR1N: R98.1 U1.2 U2.2
DIR2N: R100.1 U1.10 U2.4
DIR3N: R25.1 U2.6 U5.5
DIR4N: R51.1 U2.8 U5.10
DIR5N: R69.1 U2.10 U7.5
DIR-IO-1: R102.2 U1.4 U2.1 U6.29
DIR-IO-2: R99.2 U1.12 U2.3 U6.39
DIR-IO-3: R26.2 U2.5 U5.1 U6.20
DIR-IO-4: R52.2 U2.9 U5.12 U6.21
DIR-IO-5: R70.2 U2.11 U6.22 U7.1
ENC-HEAD-A: U3.5 U6.35
ENC-HEAD-A1: C9.1 J2.5 R4.1 U3.15
ENC-HEAD-B: U3.4 U6.36
ENC-HEAD-B1: C8.1 J2.4 R3.1 U3.16
ENC-L-A: U6.33 U8.5
ENC-L-A-J: C33.1 J7.2 R37.1 U8.15
ENC-L-B: U6.32 U8.4
ENC-L-B-J: C34.1 J7.3 R38.1 U8.16
ENC-R-A: U6.31 U8.3
ENC-R-A-J: C36.1 J7.5 R40.1 U8.17
ENC-R-B: U6.30 U8.2
ENC-R-B-J: C37.1 J7.6 R41.1 U8.18
ENC-W-L: U3.7 U6.40
ENC-W-L1: C22.1 J3.3 R15.1 U3.13
ENC-W-R: U3.9 U6.41
ENC-W-R1: C24.1 J4.3 R17.1 U3.11
FAULT: D3.1 D4.1 Q25.3 R129.2 U6.4
GND: C1.2 C2.2 C3.2 C4.2 C5.2 C6.2 C7.2 C8.2 C9.2 C10.2 C11.1 C12.1 C13.2 C14.1 C15.2 C16.1 C17.1 C18.2 C19.2 C20.1 C21.2 C22.2 C23.2 C24.2 C25.2 C26.1 C27.1 C29.1 C30.2 C31.2 C32.2 C33.2 C34.2 C35.2 C36.2 C37.2 C38.2 C39.2 C40.2 C41.2 C43.2 C44.2 C46.2 C47.2 C48.2 C49.2 C50.2 C51.2 C52.2 C53.2 C54.2 C57.2 C58.2 C59.2 C60.2 C61.2 C62.2 D1.3 J1.3 J1.4 J2.1 J3.4 J4.4 J6.4 J7.1 Q3.2 Q4.2 Q7.2 Q8.2 Q11.2 Q12.2 Q17.2 Q22.2 Q23.2 Q24.2 Q25.2 R5.1 R6.1 R7.1 R8.2 R11.2 R13.2 R20.2 R24.2 R28.1 R31.2 R32.2 R34.1 R36.1 R53.1 R56.1 R62.1 R71.1 R74.1 R77.2 R84.2 R85.2 R86.1 R87.1 R101.1 R103.1 R106.1 R109.1 R110.1 R120.2 R121.2 R127.1 R128.1 U1.7 U2.7 U3.1 U3.10 U3.19 U4.2 U5.7 U6.8 U6.23 U6.47 U7.7 U8.1 U8.10 U8.11 U8.19 U9.4 U10.4 | length 36126.8
  Top Layer w10: C13.2 -1647.59,4949 -1532.48,4949 -1532.48,4948.31 -1501.02,4948.31 -1440,4887.28 -1381.02,4887.28 -1320,4948.31 C22.2 -1302.24,4949 -1187.12,4949 ; R128.1 -1447.44,5701.44 -1324.45,5578.45 -1324.45,5535.45 -1280,5491 -1213.37,5491 -1184.37,5520 ; -1204.19,7152.8 -1205,7153.61 -1205,7307.89 -1204.19,7308.7 ; -1187.12,4948.31 -1187.12,4949 ; -1072,4887.28 -1053.72,4887.28 ; C7.2 -1044.29,5586 ; C33.2 -841.77,4949 -956.89,4949 -956.89,4948.31 -988.69,4948.31 -1017,4920 -1017,4910.28 -1040,4887.28 -1053.72,4887.28 ; Q11.2 Q12.2 Q3.2 -456,6183.69 ; C32.2 -726.65,4949 C24.2@-611.53,4949 ; J2.1 -631,7473.43 -631,7640 -574.9,7696.1 J4.4 ; C24.2 C24.2@-611.53,4949 ; -423.74,6690.8 -423.74,6518.09 -440,6501.83 -549.17,6501.83 -571,6480 -571,6412 -456,6297 -456,6183.69 ; -266.18,4887.28 -247.72,4887.28 ; -246.57,6371.91 -246.57,6301 -282,6265.57 -282,6195.69 -270,6183.69 ; R11.2 -203.82,5520 ; -66.02,5888.31 -66.02,5889 49.1,5889 C41.2 70,5888.31 ; J6.4 40,6655.37 81,6614.37 81,6420 92.95,6408.05 160,6408.05 160,6193.69 150,6183.69 ; J3.4 121.84,7774.84 137,7790 137,7889.16 200,7952.16 U8.1 504.84,7952.16 554.84,7902.16 U8.19 648,7902.16 ; U8.10 U8.11 656,7502.16 ; 280.79,6183.69 279,6183.69 ; 309.41,4948.31 279,4948.31 185.69,4855 48,4855 15.72,4887.28 -247.72,4887.28 ; 309.41,5000 351.41,5042 1073.24,5042 1115.24,5000 R24.2 ; C46.2 C46.2@394.45,5888 ; 506.17,6408.05 468,6408.05 468,6183.69 ; C36.2 C36.2@509.57,5888 ; 588.76,6183.69 468,6183.69 ; U3.10 656,7502.16 ; C37.2 C37.2@739.8,5889 ; 897.05,6219.45 876,6219.45 864,6231.45 864,6240 ; C38.2 C38.2@970.04,5888 ; C50.2 C50.2@1085.16,5888 ; C58.2 C58.2@1315.4,5889 ; R56.1 1379.08,6224 1353,6224 1342,6235 1342,6360 1293.95,6408.05 U5.7 1184,6408.05 1184,6400 1160,6376 996,6376 963.95,6408.05 U7.7 864,6408.05 864,6240 ; C60.2 C60.2@1430.51,5889 ; 1538.37,7593.68 1538.37,7594 ; R77.2 R32.2 1971.76,6684.05 ; 1775.87,5888.31 1775.87,5889 ; R110.1 1850,1040.51 1850,990 1887.5,952.5 Q23.2 ; 1890.99,5888.31 1890.99,5889 ; 2036.19,4887.28 2036.19,4887 2151.31,4887 R36.1 2185.28,4887.28 2198,4900 2198,5000 2240,5042 2454.66,5042 2496.66,5000 ; R71.1 2055.14,6149.86 2080,6125 2262.86,6125 2342,6204.14 2351,6204.14 ; R20.2 2496.66,5000 ; R20.2@2496.66,4949 2612,4949 R13.2 2640,4948.31 2696,4892.31 2696,4797 3093,4400 3211,4400 3697,4886 3697,4940.43 3744,4940.43 3815.87,5012.31 3844.95,5012.31 3877.26,4980 C9.2 3877,4950 3996.32,4950 3996.32,4950.28 4025,4950.28 4025,4919 4226.42,4919 4237.42,4930 C8.2 ; C3.2 2429.83,6682.05 ; C19.2 2688,5888.31 2626.98,5827.28 2581.7,5827.28 2581.7,5827 2466.58,5827 ; R53.1 2806.32,5973.68 2811.93,5968.07 C21.2 2781,5888.31 2781,5800 2795,5786 2913.05,5786 2927.05,5800 C20.1@2927.05,5827 ; C20.1 C20.1@2927.05,5827 ; 3042.17,5827.28 3042.17,5827 ; 3157.29,5888.31 3181.92,5888.31 ; 4008.22,6204.14 4008.22,6183.78 ; 4277.83,6682.05 C39.2 4057,6638.88 4057,6510 4047,6500 3931.88,6500 C18.2 3749.83,6642.17 3760,6632 3796.88,6632 R7.1 3827,6492.21 3827,6233 3829,6231 3857.98,6231 3857.98,6172 ; 4308.69,6204.14 4308.69,6183.31 ; R85.2 5585.7,6300 ; R127.1 5767,6204.14 5767,6300 5585.7,6300 ; -1187.12,4949 -1187.12,4980 ; -1187.12,4980 -1165.24,5001.88 -1042.88,5001.88 -1041,5000 -1041,4900 -1053.72,4887.28 ; -1187.12,4980 -1187.12,5132.25 -1184.37,5135 -1184.37,5520 ; -1184.37,5520 C6.2 -1184.37,5586 -1044.29,5586 ; -1044.29,5586 -685.08,5586 -685.08,5520 -662.08,5497 -226.82,5497 -203.82,5520 ; C24.2@-611.53,4949 -496.41,4949 C23.2 -496.41,4948 -381.29,4948 C25.2 -381.29,4970 -370.29,4981 -235,4981 -235,4900 -247.72,4887.28 ; -456,6183.69 Q4.2 -270,6183.69 ; -270,6183.69 Q8.2 Q7.2 Q25.2 150,6183.69 ; -203.82,5520 -180.82,5497 53.34,5497 76.34,5520 R8.2 76.34,5766.34 80,5770 80,5878.31 70,5888.31 ; 70,5888.31 C44.2 164.21,5889 279.33,5889 ; 150,6183.69 279,6183.69 ; 279,6183.69 468,6183.69 ; 279,6183.69 279,5953 279.33,5952.67 279.33,5889 ; 279.33,5889 279.33,5888 C46.2@394.45,5888 ; C46.2@394.45,5888 C36.2@509.57,5888 ; 468,6183.69 776,6183.69 776,6240 818,6282 822,6282 864,6240 ; C36.2@509.57,5888 624.69,5888 C35.2 624.69,5889 C37.2@739.8,5889 ; 648,7902.16 656,7894.16 656,7502.16 ; 648,7902.16 656,7902.16 656,7940 668.16,7952.16 U3.1 945,7952.16 995,7902.16 U3.19 1351.22,7902.16 1538.37,7715 1538.37,7594 ; C37.2@739.8,5889 854.92,5889 C40.2 854.92,5888 C38.2@970.04,5888 ; C38.2@970.04,5888 C50.2@1085.16,5888 ; C50.2@1085.16,5888 1200.28,5888 C59.2 1200.28,5889 C58.2@1315.4,5889 ; C58.2@1315.4,5889 C60.2@1430.51,5889 ; C60.2@1430.51,5889 1545.63,5889 C62.2 1545.63,5888 1660.75,5888 C61.2 1660.75,5889 1775.87,5889 ; 1538.37,7594 1971.76,7594 1971.76,6684.05 ; 1775.87,5889 1890.99,5889 ; 1890.99,5889 2006.11,5889 C53.2 2006.11,5888 2121.22,5888 C57.2 2121.22,5889 2236.34,5889 C54.2 2236.34,5888 2351.46,5888 C34.2 2351.46,5920 ; 1971.76,6684.05 2200,6684.05 2247.05,6637 2338,6637 2383.05,6682.05 2429.83,6682.05 ; 2351,6204.14 2387,6204.14 2387,6346 2481.88,6440.88 2481.88,6630 2429.83,6682.05 ; 2351,6204.14 2351,5968 2351.46,5967.54 2351.46,5920 ; 2351.46,5920 2366.46,5935 2483,5935 2498,5920 2498,5840 2485.28,5827.28 2466.58,5827.28 2466.58,5827 ; 2466.58,5827 2466.58,5689 2496.66,5658.92 2496.66,5000 ; C20.1@2927.05,5827 3042.17,5827 ; 3042.17,5827 3042.17,5797.94 3008,5763.77 3008,4520 3048,4480 3289,4480 3449,4640 3449,5840 3400.69,5888.31 3181.92,5888.31 ; 3181.92,5888.31 R74.1 3181.92,6231 3211,6231 3221.83,6241.83 R6.1 3353.83,6547.05 3386.79,6580 3452.88,6580 3557.51,6475.38 R84.2 3580,6265.17 3595,6250.17 3595,6219.14 3610,6204.14 3632.62,6204.14 3632.62,6172 3857.98,6172 ; 3857.98,6172 3857.98,6160 3867.76,6150.22 3980,6150.22 4008.22,6178.43 4008.22,6183.78 ; 4008.22,6183.78 4020,6172 4308.69,6172 4308.69,6183.31 ; 4308.69,6183.31 4320,6172 4834.52,6172 4834.52,6204.14 4803,6204.14 4803,6430.2 4898,6525.2 U9.4 5016,6525.2 5041,6550.2 5221.8,6550.2 5232,6540 5232,6525.2 U10.4 5401.8,6525.2 5585.7,6341.3 5585.7,6300
  Bottom Layer w10: -1204.19,7308.7 -1131.75,7381.14 J7.1 -913.34,7416.06 J2.1 ; J4.4 -380.9,7696.1 -377,7700 -94,7700 -19.16,7774.84 J3.4
HEAD_IO_L: U3.3 U6.45
HEAD_IO_L1: C7.1 J2.3 R2.1 U3.17
HEAD_IO_R: U3.2 U6.46
HEAD_IO_R1: C6.1 J2.2 R1.1 U3.18
MOT-H-A: C28.2 J5.1 Q1.5 R33.2
MOT-H-B: C28.1 J5.2 Q2.5 R33.1
MOT-L-A: C56.2 J8.1 Q13.3 Q18.3 R126.2 | length 135
  Top Layer w20: R126.2 C56.2
MOT-L-B: C56.1 J8.2 Q14.3 Q19.3 R126.1 | length 602.8
  Top Layer w20: Q19.3@1380.35,545 Q19.3 ; R126.1 C56.1
  Top Layer w50: Q19.3 1452.03,616.68 Q14.3
MOT-R-A: C55.2 J8.3 Q16.3 Q20.3 R125.2 | length 130
  Top Layer w20: R125.2 C55.2
MOT-R-B: C55.1 J8.4 Q15.3 Q21.3 R125.1 | length 130
  Top Layer w20: R125.1 C55.1
MOT-STOP1: C32.1 J1.5 R36.2 U8.12
MOT-W-LA: C42.2 J3.6 Q5.5 R57.2
MOT-W-LB: C42.1 J3.5 Q6.5 R57.1
MOT-W-RA: C45.2 J4.7 Q9.5 R75.2
MOT-W-RB: C45.1 J4.6 Q10.5 R75.1
NetC26_2: C26.2 U6.5 X1.2
NetC27_2: C27.2 U6.6 X1.1
NetC29_2: C29.2 R35.1 U6.7
NetC43_1: C43.1 R58.1 R59.2 R62.2
NetC49_1: C49.1 R92.1 R93.2 R101.2 | length 200.4
  Top Layer w10: R92.1 885,764.49 C49.1 R101.2 885.51,631.16 R93.2
NetC59_1: C59.1 J7.8 R64.1 R65.1
NetQ1_1: Q1.1 Q2.1 R21.2 R22.2 R27.2 R32.1
NetQ1_2: Q1.2 R22.1 R29.1
NetQ1_4: Q1.4 R9.1 R18.2
NetQ2_2: Q2.2 R21.1 R30.1
NetQ2_4: Q2.4 R10.1 R19.2
NetQ3_1: Q3.1 R26.1 R28.2
NetQ3_3: Q3.3 R18.1
NetQ4_1: Q4.1 R25.2 R31.1
NetQ4_3: Q4.3 R19.1
NetQ5_1: Q5.1 Q6.1 Q9.1 Q10.1 R49.1 R50.1 R67.1 R68.1 R76.2 R77.1
NetQ5_2: Q5.2 R49.2 R54.1
NetQ5_4: Q5.4 R45.1 R47.2
NetQ6_2: Q6.2 R50.2 R55.1
NetQ6_4: Q6.4 R46.1 R48.2
NetQ7_1: Q7.1 R52.1 R53.2
NetQ7_3: Q7.3 R47.1
NetQ8_1: Q8.1 R51.2 R56.2
NetQ8_3: Q8.3 R48.1
NetQ9_2: Q9.2 R68.2 R72.1
NetQ9_4: Q9.4 R60.1 R63.2
NetQ10_2: Q10.2 R67.2 R73.1
NetQ10_4: Q10.4 R61.1 R66.2
NetQ11_1: Q11.1 R70.1 R71.2
NetQ11_3: Q11.3 R63.1
NetQ12_1: Q12.1 R69.2 R74.2
NetQ12_3: Q12.3 R66.1
NetQ13_1: Q13.1 R88.1 R94.2 | length 204.7
  Top Layer w10: R88.1 R94.2 2236.81,639.49 Q13.1
NetQ14_1: Q14.1 R89.1 R95.2 | length 211.8
  Top Layer w10: Q14.1 1747.11,945.51 R95.2 R89.1
NetQ15_1: Q15.1 R91.1 R97.2
NetQ16_1: Q16.1 R90.1 R96.2
NetQ17_1: Q17.1 R99.1 R106.2
NetQ17_3: Q17.3 R96.1
NetQ18_1: Q18.1 R104.1 R112.2 | length 242.6
  Top Layer w10: R104.1 R112.2 2186.06,1075.55 Q18.1
NetQ18_2: Q18.2 Q19.2 R104.2 R105.2 R116.1 R120.1 | length 309.2
  Top Layer w10: Q19.2 1835.04,705.55 R105.2 ; R104.2 2135.04,894.45 Q18.2
NetQ19_1: Q19.1 R105.1 R113.2 | length 338.1
  Top Layer w10: Q19.1 1702.44,514.49 R113.2 1895,564.49 1895,604.49 R105.1
NetQ20_1: Q20.1 R107.1 R114.2
NetQ20_2: Q20.2 Q21.2 R107.2 R108.2 R117.1 R121.1
NetQ21_1: Q21.1 R108.1 R115.2
NetQ22_1: Q22.1 R102.1 R103.2 | length 300.8
  Top Layer w10: Q22.1 1985,685.46 1985,605 2024.49,565.51 R103.2 R102.1
NetQ22_3: Q22.3 R94.1 | length 62.1
  Top Layer w10: Q22.3 2184.34,699.5 R94.1
NetQ23_1: Q23.1 R98.2 R110.2 | length 272
  Top Layer w10: R110.2 1970,1019.49 R98.2 2009.49,990 2009.49,924.49 1962.5,877.5 Q23.1
NetQ23_3: Q23.3 R95.1 | length 74.5
  Top Layer w10: R95.1 1840.68,884.49 Q23.3
NetQ24_1: Q24.1 R100.2 R109.2
NetQ24_3: Q24.3 R97.1
NetQ25_1: Q25.1 R130.1
NetR34_2: R34.2 U6.44
NetR78_2: R78.2 R79.1 R82.1 U9.1
NetR80_2: R80.2 R81.2 R83.1 U9.7
NetR82_2: R82.2 R84.1 U9.2
NetR83_2: R83.2 R85.1 U9.6
NetR111_1: R111.1 R118.1 R123.2 U10.1
NetR119_1: R119.1 R122.2 R124.2 U10.7
NetR123_1: R123.1 R127.2 U10.2
NetR124_1: R124.1 R128.2 U10.6
NetR130_2: R130.2 U8.8
PWM-1-A: R112.1 U1.3
PWM-1-B: R113.1 U1.6
PWM-2-A: R114.1 U1.8
PWM-2-B: R115.1 U1.11
PWM-3-A: R29.2 U5.6
PWM-3-B: R30.2 U5.3
PWM-4-A: R54.2 U5.8
PWM-4-B: R55.2 U5.11
PWM-5-A: R72.2 U7.6
PWM-5-B: R73.2 U7.3
PWM-IO-1: R8.1 U1.1 U1.5 U6.12
PWM-IO-2: R11.1 U1.9 U1.13 U6.13
PWM-IO-3: R13.1 U5.2 U5.4 U6.14
PWM-IO-4: R20.1 U5.9 U5.13 U6.16
PWM-IO-5: R24.1 U6.17 U7.2 U7.4
SEN1: D2.1 R59.1 U6.27
SEN2: D5.1 R93.1 U6.26
SWCLK: J6.3 U6.37
SWDIO: J6.2 U6.34
UART1RX: R23.1 U6.43
UART1RX-J: D1.2 J1.6 R23.2 | length 1801.3
  Top Layer w10: J1.6 331.81,738.19 550.31,519.69 D1.2 989.69,519.69 1040,570 1040,1520
UART1TX: R12.1 U6.42
UART1TX-J: D1.1 J1.7 R12.2 | length 1683.1
  Top Layer w10: J1.7 401.97,480.32 D1.1 964.62,480.32 1065,580.69 1065,1415
VCC-5V: C5.1 C10.1 C11.2 C12.2 C14.2 C20.2 C40.1 J1.8 R65.2 U1.14 U2.13 U2.14 U4.1 U4.3 U5.14 U7.9 U7.10 U7.12 U7.13 U7.14 | length 1081.9
  Top Layer w10: J1.8 398.98,327.4 ; v1(605,445) U4.1 398.98,327.4 ; v1(605,575) 605,645.51 609.49,650 C11.2@609.49,730 ; C14.2 605,164.49 U4.3 473.78,252.6 398.98,327.4
  Bottom Layer w10: v1(605,445) v1(605,575)
VCC-22V: F2.2 J1.2 | length 361.8
  Top Layer w50: J1.2 530.04,1361.81 F2.2
VCC-22V-O: C2.1 C4.1 C18.1 C39.1 F2.1 Q1.3 Q2.3 Q5.3 Q6.3 Q9.3 Q10.3 R6.2 R7.2 R9.2 R10.2 R45.2 R46.2 R58.2 R60.2 R61.2 | length 233.4
  Top Layer w50: C2.1 775,1453.23 F2.1
VCC-24V: F1.2 J1.1 | length 295.4
  Top Layer w50: F1.2 220,1597.72 J1.1
W_IO_L: U3.6 U6.28
W_IO_L1: C21.1 J3.2 R14.1 U3.14
W_IO_R: U3.8 U6.38
W_IO_R1: C23.1 J4.2 R16.1 U3.12
WHEEL-FLOAT-L: D4.2 U6.3 U8.6
WHEEL-FLOAT-L1: C35.1 J7.4 R39.1 U8.14
WHEEL-FLOAT-R: D3.2 U6.2 U8.7
WHEEL-FLOAT-R1: C38.1 J7.7 R42.1 U8.13
pads on no net: J4.5 U2.12 U4.4 U6.15 U6.25 U7.8 U7.11 U8.9
copper on no net: | length 3330.5
  Top Layer w10: 2962.07,7785.14 2969.68,7777.53 2983.03,7777.53 3060.11,7700.44 3060.11,7589.28 3046.83,7576 3046.83,6307.21 3072.88,6281.16 3072.88,5803.2 3041.54,5771.85 3041.54,4863.2 3060,4844.73 3060,4540

## Keep-outs
Keep-Out Layer:
  lines w10: 50,3750 cw(c200,3750) 200,3900 ; 51,200 ccw(c201,200) 201,50 ; 4130,50.47 ccw(c4130,200) 4279.53,200 ; 4130.37,3900.18 cw(c4130.37,3750.65) 4279.88,3748.34
  lines w11.81: 51.18,200 51.18,3750 ; 200,3900 4130,3900 ; 202,51.18 4140,51.18 ; 4279.53,200 4279.53,3750

## Silkscreen, mask and mechanical layers (free items; w line width, h text height)
Drill Drawing:
  text ".LEGEND" at 70.71,-3224.49 h60
  text "Drill Drawing." at 70.71,-3324.49 h60